# Altium PCB FEU31_Part2.PcbDoc
Units mm, origin at the board's own origin, x right, y up, seen from the top; angles counter-clockwise.
Board outline 40 x 40 mm, 2 copper layers (Top Layer, Bottom Layer), stack 1.021 mm thick; 66 components, 35 nets, 154 pads, 12 vias.
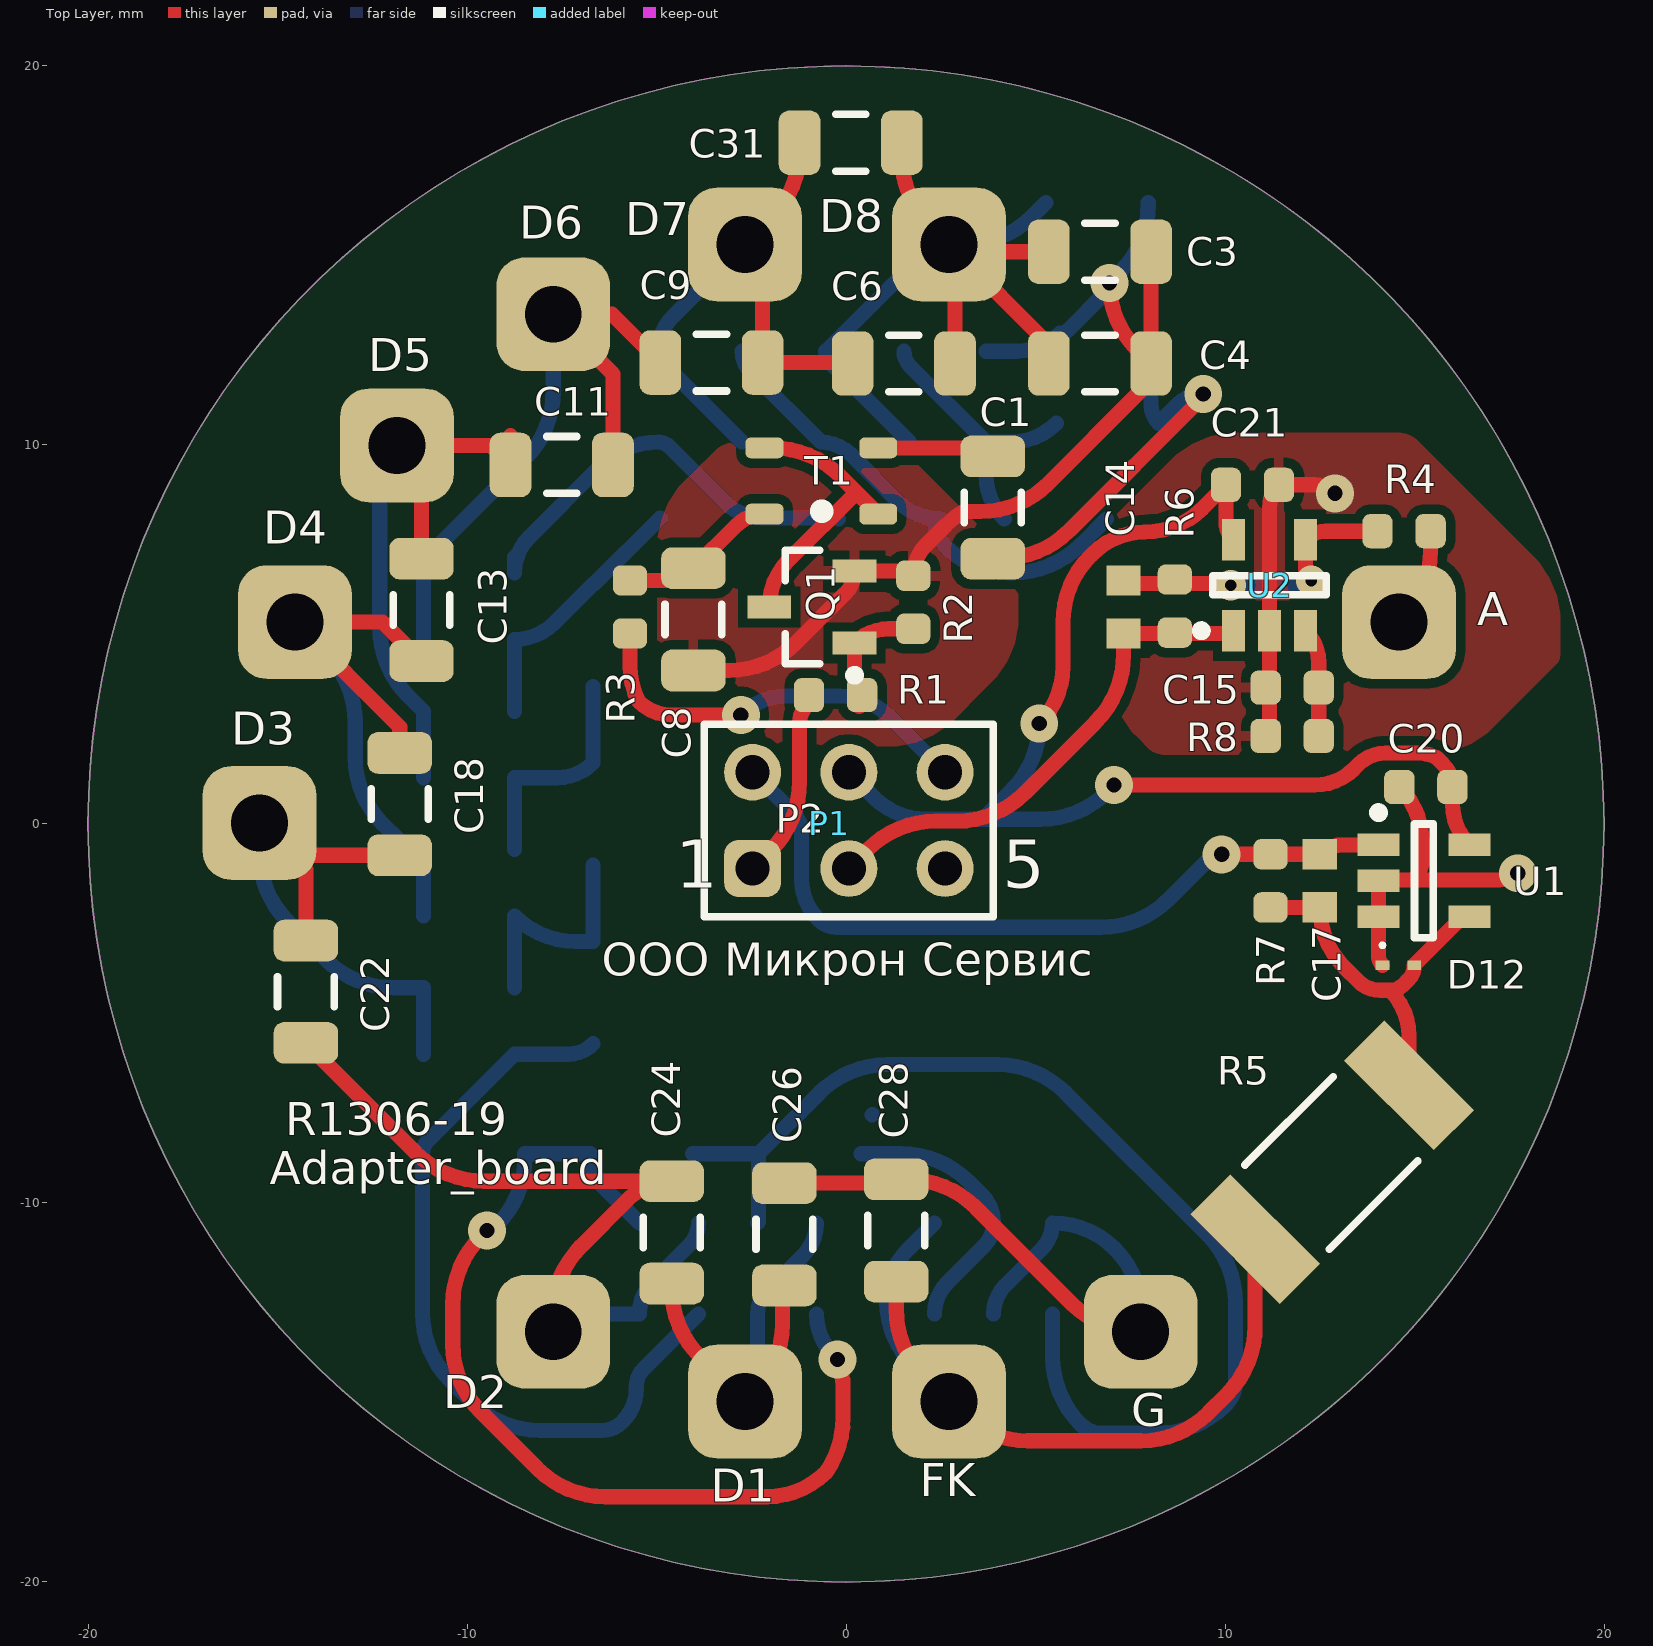
[diagram p0: Top Layer view]
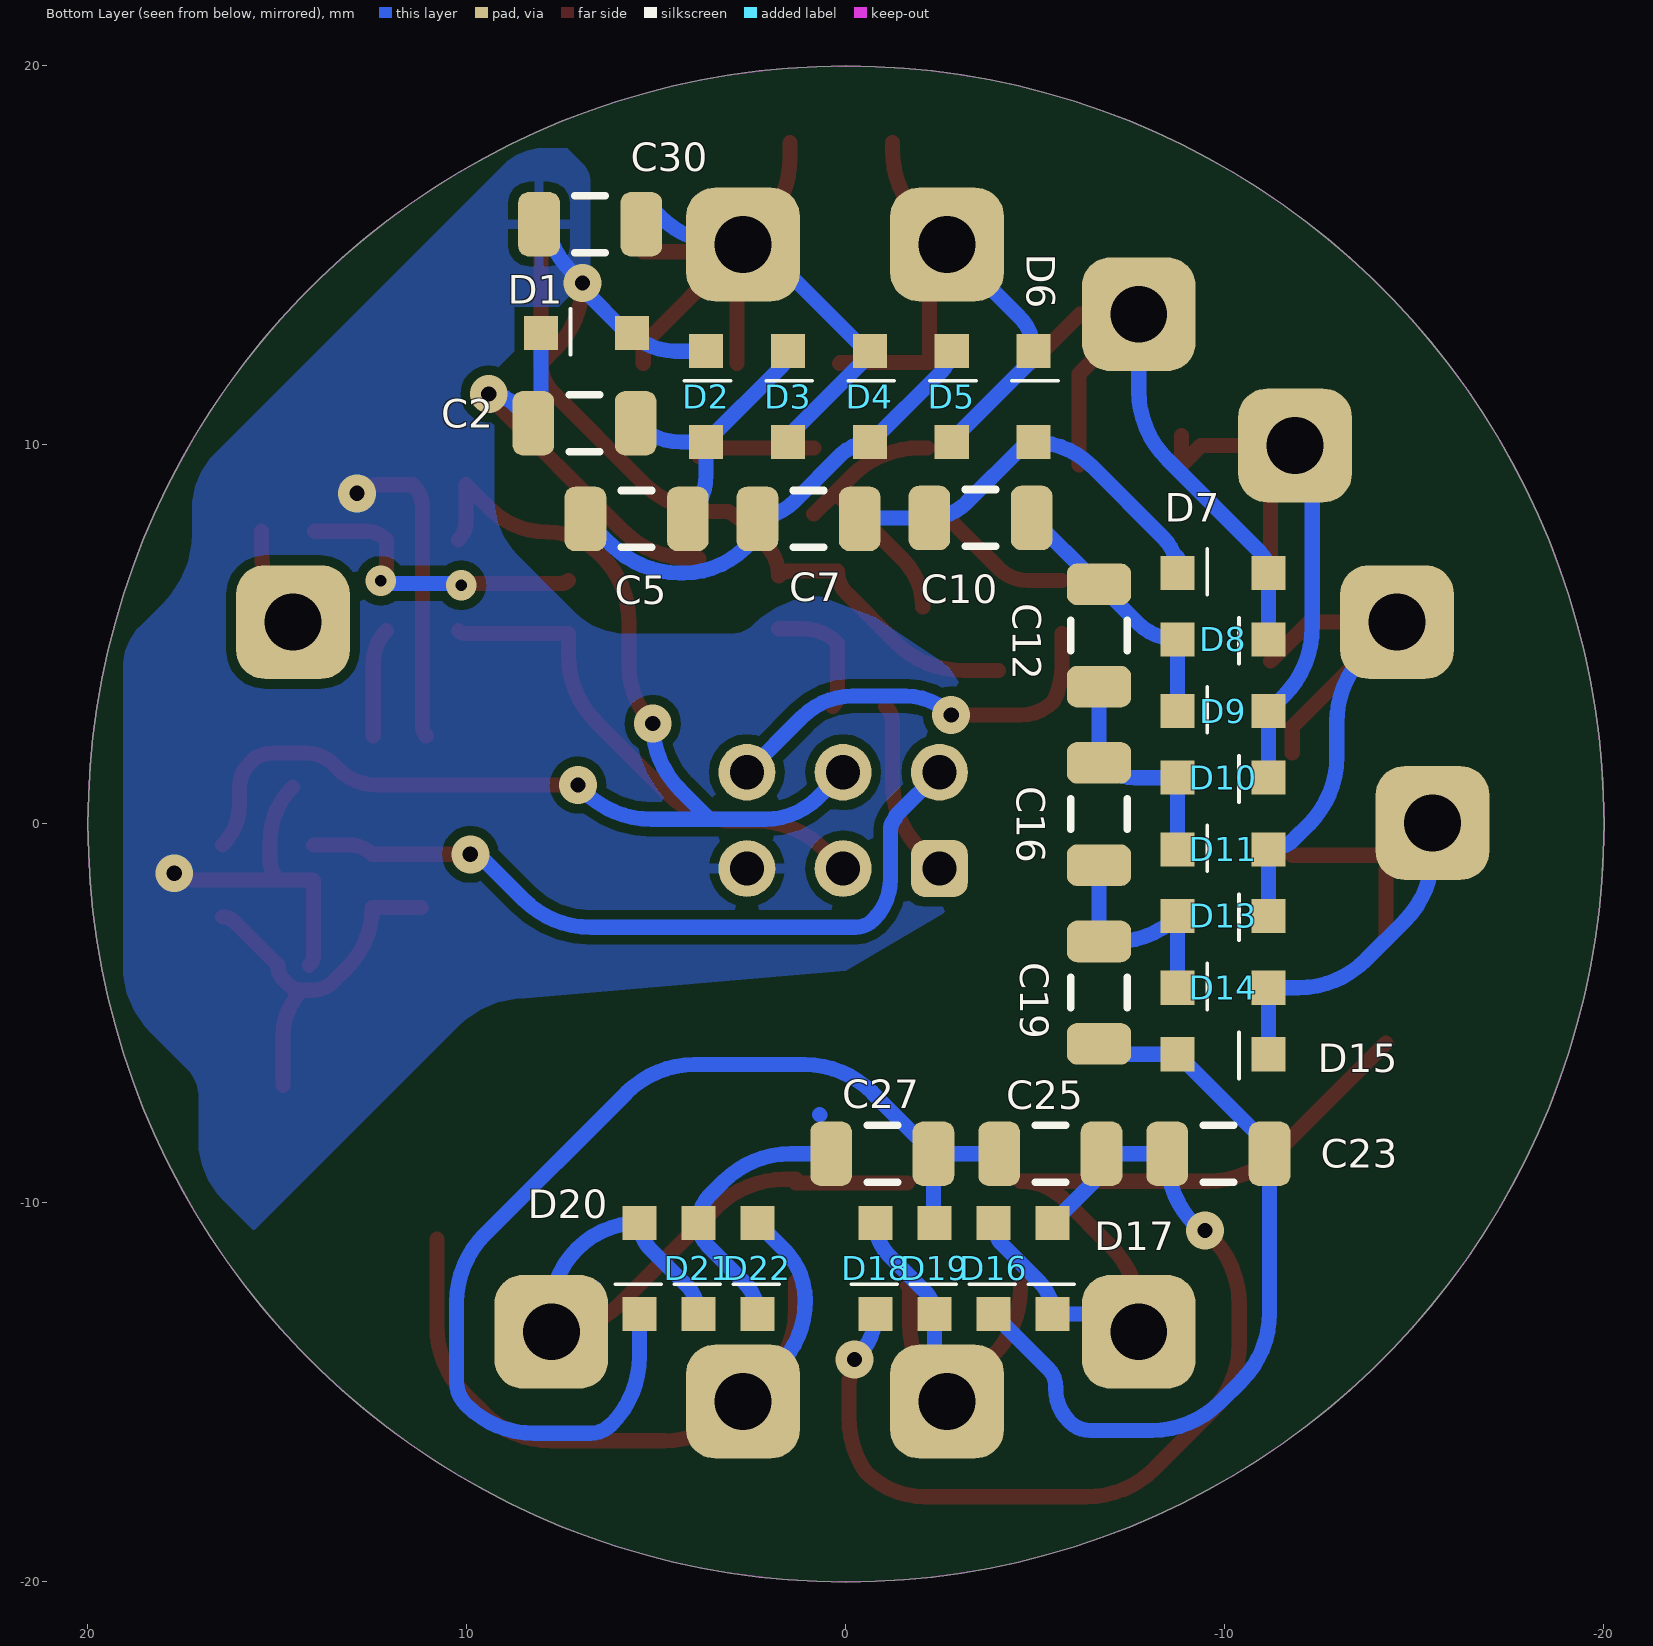
[diagram p1: Bottom Layer view, seen from below]
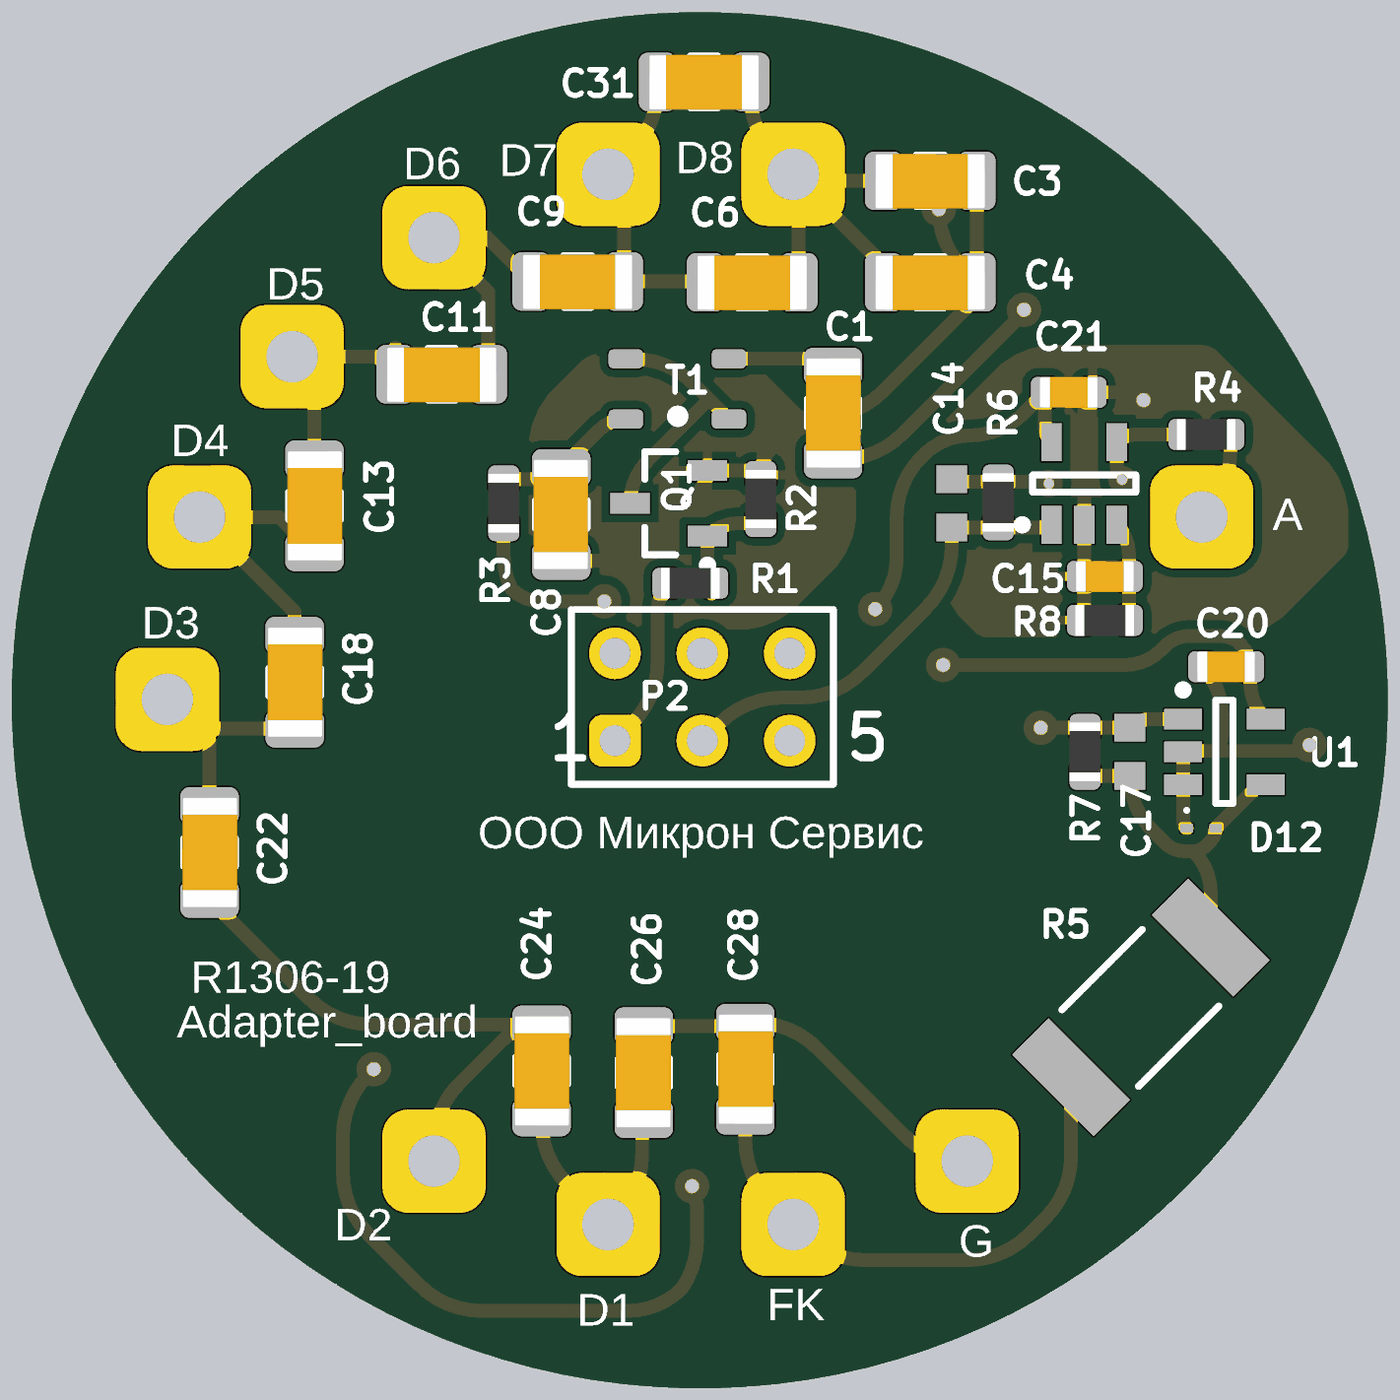
[diagram p2: 3D render of the assembled board from above, using the file's embedded part models]

## Layer stack, top to bottom
Top Solder: solder mask 0.0102, Solder Resist, Dk 3.5
Top Layer: signal copper 0.0356
Dielectric1: dielectric 0.95, FR-4, Dk 4.8
Bottom Layer: signal copper 0.0356
Bottom Solder: solder mask 0.0102, Solder Resist, Dk 3.5

## Board outline
-20.025,-0.025 ccw(c-0.025,-0.025) -0.025,-20.025 ccw(c-0.025,-0.025) 19.975,-0.025 ccw(c-0.025,-0.025) -0.025,19.975 ccw(c-0.025,-0.025)

## Design rules (kind name [scope] priority, off if disabled: settings)
Clearance [All] p1: gap=0.25
ComponentClearance [All] p1: gap=0.1 collisioncheckmode=3 verticalgap=0.254 showdistances=TRUE
HoleSize [All] p1: absolutevalues=TRUE maxlimit=2.54 minlimit=0.3 maxpercent=80.000 minpercent=20.000
HoleToHoleClearance [All] p1: gap=0.2 allowstackedmicrovias=TRUE
MinimumAnnularRing [All] p1: minimumring=0.3
MinimumSolderMaskSliver [All] p1: minsoldermaskwidth=0.152
PlaneClearance [All] p1: clearance=2
PlaneConnect [All] p1: planeconnectstyle=Relief reliefexpansion=0.457 reliefentries=4 reliefconductorwidth=0.3 reliefairgap=0.457
PolygonConnect PolygonConnect_via [IsVia] p1: connectstyle=Direct reliefconductorwidth=0.254 reliefentries=4 polygonreliefangle="90 Angle" airgapwidth=0.254
PolygonConnect [All] p2: connectstyle=Relief reliefconductorwidth=0.254 reliefentries=4 polygonreliefangle="90 Angle" airgapwidth=0.254
RoutingVias [All] p1: holewidth=0.3 width=0.62 viastyle="Through Hole" minholewidth=0.3 minwidth=0.62 maxholewidth=6 maxwidth=4
SilkToSilkClearance [All] p1: silktosilkclearance=0.152
SilkToSolderMaskClearance SilkscreenOverComponentPads [IsPad] p1: minsilkscreentomaskgap=0.1 clearancetoexposedcopper=TRUE
SolderMaskExpansion [All] p1: expansion=0.05
Width [All] p1: maxlimit=2.254 minlimit=0.4 preferedwidth=0.4
22 further rules are at their usual default settings.

## Components (designator, comment, footprint, x,y, rotation, side; value= is the part's Value field where it differs from the comment)
C1 "100nF" C1206 3.85,8.325 r90 top
C2 "100nF" C1206 6.875,10.55 r0 bottom
C3 "100nF" C1206 6.675,15.075 r0 top
C4 "100nF" C1206 6.675,12.125 r0 top
C5 "100nF" C1206 5.5,8.025 r180 bottom
C6 "100nF" C1206 1.5,12.125 r0 top
C7 "100nF" C1206 0.962,8.025 r0 bottom
C8 "4.7uF" C1206 -4.05,5.375 r270 top
C9 "100nF" C1206 -3.575,12.15 r0 top
C10 "100nF" C1206 -3.575,8.05 r0 bottom
C11 "100nF" C1206 -7.525,9.45 r0 top
C12 "100nF" C1206 -6.7,4.95 r90 bottom
C13 "100nF" C1206 -11.225,5.625 r90 top
C14 "2.2pF" 1608[0603] 7.3,5.7 r270 top
C15 "0pF" 1608[0603]_CAP 11.75,3.575 r180 top
C16 "100nF" C1206 -6.7,0.238 r90 bottom
C17 "0pF" 1608[0603] 12.475,-1.525 r90 top
C18 "100nF" C1206 -11.8,0.5 r90 top
C19 "100nF" C1206 -6.7,-4.475 r90 bottom
C20 "1uF" 1608[0603]_CAP 15.275,0.95 r180 top
C21 "1uF" 1608[0603]_CAP 10.7,8.925 r0 top
C22 "100nF" C1206 -14.275,-4.45 r90 top
C23 "100nF" C1206 -9.85,-8.725 r180 bottom
C24 "100nF" C1206 -4.625,-10.8 r90 top
C25 "100nF" C1206 -5.417,-8.725 r180 bottom
C26 "100nF" C1206 -1.65,-10.85 r270 top
C27 "100nF" C1206 -0.983,-8.725 r180 bottom
C28 "100nF" C1206 1.3,-10.75 r90 top
C30 "100nF" C1206 6.725,15.8 r0 bottom
C31 "100nF" C1206 0.1,17.95 r0 top
D1 "" DA2JF8100L 5.625,12.925 r0 bottom
D2 "" DA2JF8100L 3.665,10.05 r90 bottom
D3 "" DA2JF8100L 1.505,10.05 r90 bottom
D4 "" DA2JF8100L -0.655,10.05 r90 bottom
D5 "" DA2JF8100L -2.815,10.05 r90 bottom
D6 "" DA2JF8100L -4.975,10.05 r90 bottom
D7 "" DA2JF8100L -11.175,6.6 r0 bottom
D8 "" DA2JF8100L -8.775,4.846 r180 bottom
D9 "" DA2JF8100L -11.175,2.951 r0 bottom
D10 "" DA2JF8100L -8.775,1.197 r180 bottom
D11 "" DA2JF8100L -11.175,-0.697 r0 bottom
D12 "ESD9R3.3ST5G" ONSC-SOD-923-2-514AB-01_V 14.55,-3.75 r0 top
D13 "" DA2JF8100L -8.775,-2.451 r180 bottom
D14 "" DA2JF8100L -11.175,-4.346 r0 bottom
D15 "" DA2JF8100L -8.775,-6.1 r180 bottom
D16 "" DA2JF8100L -3.918,-10.55 r270 bottom
D17 "" DA2JF8100L -5.475,-10.55 r270 bottom
D18 "" DA2JF8100L -0.804,-10.55 r270 bottom
D19 "" DA2JF8100L -2.361,-10.55 r270 bottom
D20 "" DA2JF8100L 5.425,-10.55 r270 bottom
D21 "" DA2JF8100L 3.868,-10.55 r270 bottom
D22 "" DA2JF8100L 2.311,-10.55 r270 bottom
P1 "Header 9X2" R1306-19 0,0 r0 top locked
P2 "Header 3X2" HDR2X3 -2.49,-1.2 r0 top
Q1 "IRLML6344" SOT-23_N -0.925,5.7 r180 top
R1 "100R" 1608[0603]_RES -0.3,3.375 r0 top
R2 "47k" 1608[0603]_RES 1.75,5.825 r270 top
R3 "12R" 1608[0603]_RES -5.725,5.7 r270 top
R4 "390K" 1608[0603]_RES 14.7,7.7 r0 top
R5 "5G" HVF2512T5007FE 12.8,-8.95 r45 top
R6 "47k" 1608[0603]_RES 8.65,5.725 r270 top
R7 "15M" 1608[0603]_RES 11.175,-1.525 r90 top
R8 "0R" 1608[0603]_RES 11.75,2.3 r0 top
T1 "ATB322515-0110" ATB322515-0110 -2.175,9.9 r0 top
U1 "AD8541ARTZ" ADI-RJ-5_N 15.225,-1.525 r0 top
U2 "OPA353NA" ADI-RJ-5_N 11.15,6.275 r90 top

## Footprints (in the part's own frame and the unit in brackets; to place one, negate y for a bottom-side part, rotate by r counter-clockwise, add the part's x,y. Pads: shape width x height; smd on the part's side, far side on the other; paste and mask are expansions set on the pad)
1608[0603] [mm] "Chip Capacitor, Body 1.6x0.8mm, IPC High Density"
  rect 0.8x0.9 smd: 1(-0.7,0) 2(0.7,0)
  body extent -0.87,-0.48 0.87,0.48, height 1.3
1608[0603]_CAP [mm] "Chip Capacitor, Body 1.6x0.8mm, IPC High Density"
  rrect50% 0.8x0.9 smd: 1(-0.7,0) 2(0.7,0)
  body extent -0.85,-0.45 0.85,0.45, height 0.8
1608[0603]_RES [mm] "Chip Capacitor, Body 1.6x0.8mm, IPC High Density"
  rrect50% 0.8x0.9 smd: 1(-0.7,0) 2(0.7,0)
  body extent -0.85,-0.45 0.85,0.45, height 0.45
ADI-RJ-5_N [mm] "SOT-23, 5-Leads, Body 2.9x1.6mm, Pitch 0.95mm, IPC Medium Density"
  rect 1.1x0.6 smd: 1(-1.2,0.95) 2(-1.2,0) 3(-1.2,-0.95) 4(1.2,-0.95) 5(1.2,0.95)
  silkscreen extent -1.32,-1.5 0.25,1.92, body extent -0.85,-1.5 0.85,1.5, height 1.45
ATB322515-0110 [mm]
  rrect50% 1x0.55 smd: 1(0,-1.75) 2(0,0) 3(3,0) 4(3,-1.75)
  silkscreen extent 1.5,-1.68 1.52,-1.66, body extent -0.1,-2.15 3.1,0.35, height 1.55
C1206 [mm] "Chip Capacitor, Body 3.2x1.6mm, IPC High Density"
  rrect50% 1.1x1.7 smd: 1(-1.35,0) 2(1.35,0)
  silkscreen extent -0.4,-0.75 0.4,0.75, body extent -1.6,-0.81 1.6,0.79, height 1.6
DA2JF8100L [mm]
  rect 0.9x0.9 smd: 1(0,0) 2(2.4,0)
  silkscreen extent 1.62,-0.64 1.62,0.57, body extent 0.36,-0.65 2.06,0.6, height 0.7
HDR2X3 [mm] "Connector; Header; 3x2 Position"
  rrect50% 1.5x1.5 hole 0.9: 1(0,0)
  round 1.5 hole 0.9: 2(0,2.54) 3(2.54,0) 4(2.54,2.54) 5(5.08,0) 6(5.08,2.54)
  silkscreen extent -1.27,-1.27 6.35,3.81
HVF2512T5007FE [mm] "Chip Resistor, 2-Leads, Body 7,31x3,20mm, IPC Low Density"
  rect 1.5x3.35 smd: 1(-2.87,0) 2(2.87,0)
  silkscreen extent -1.68,-1.58 1.62,1.57, body extent -3.68,-1.6 3.63,1.6, height 0.82
ONSC-SOD-923-2-514AB-01_V [mm] "SOD, 2-Leads, Body 0.8x0.6mm"
  rect 0.36x0.25 smd: 1(-0.42,0) 2(0.42,0)
  silkscreen extent -0.47,0.48 -0.37,0.57, body extent -0.4,-0.3 0.4,0.3, height 0.4
R1306-19 [mm]
  rrect50% 3x3 hole 1.5: 1(-2.692,-15.265) 2(-7.75,-13.423) 5(-15.5,0) 6(-14.565,5.301) 7(-11.874,9.963) 8(-7.75,13.423) 9(-2.692,15.265) 10(2.692,15.265) 13(14.565,5.301) 17(7.75,-13.423) 18(2.692,-15.265)
SOT-23_N [mm] "SOT23, 3-Leads, Body 2.9x1.3mm, Pitch 0.95mm, Lead Span 2.3mm, IPC Medium Density"
  rect 1.15x0.6 smd: 1(-1.125,0.95) 2(-1.125,-0.95) 3(1.125,0)
  silkscreen extent -1.25,-1.5 0.7,1.92, body extent -0.7,-1.5 0.7,1.5, height 1.11

## Part data
C1 C2 C3 C4 C5 C6 C7 C8 C9 C10 C11 C12 C13 C14 C15 C16 C17 C18 C19 C20 C21 C22 C23 C24 C25 C26 C27 C28 C30 C31: library part "Cap Semi", "Capacitor (Semiconductor SIM Model)"
D1 D2 D3 D4 D5 D6 D7 D8 D9 D10 D11 D13 D14 D15 D16 D17 D18 D19 D20 D21 D22: library part Diode, "Default Diode"
D12: "Transient Voltage Suppressor, ESD Protection Diode with Ultra-Low Leakage, 2-Pin SOD-923, Pb-Free, Tape and Reel"
P1: "Header, 9-Pin, Dual row"
P2: "Header, 3-Pin, Dual row"
Q1: library part IRLML2402, "HEXFET Power MOSFET"
R1 R2 R3 R4 R5 R6 R7 R8: library part "Resistor 0805"
U1 U2: library part AD8541ARTZ-R2, "Single Channel RRIO Operational Amplifier, 1 MHz BW, 920 mV/us SR, Industrial, 5-pin SOT23 (RJ-5), Reel"

## Via types
v1: diameter 1, hole 0.4, Top Layer to Bottom Layer, tented both sides, 10 vias
v2: diameter 0.8, hole 0.3, Top Layer to Bottom Layer, tented both sides, 2 vias

## Nets (pads, with @x,y where several pads share a name; then routed paths per layer and width w, separated by ;. In a path a pad name is that pad's centre, name@x,y a point inside that pad or via, vN(x,y) a via of type N, cw(c..) or ccw(c..) an arc to the next point about the centre after c; other vN are vias at no path point)
ANODE: P1.13 R4.2 | length 2.6
  Top Layer w0.4: P1.13 14.656,5.392 ccw(c12.86,7.188) 15.4,7.188 R4.2
DINODE1: C24.1 C26.2 D18.1 D19.2 P1.1 | length 12.7
  Top Layer w0.4: C24.1 -4.625,-12.279 ccw(c-2.085,-12.279) -3.881,-14.075 P1.1 -2.444,-15.017 ccw(c-4.24,-13.221) -1.7,-13.221 -1.7,-12.15 C26.2
  Bottom Layer w0.4: P1.1 -2.361,-14.934 D19.2 cw(c-1.542,-12.95) -2.121,-12.371 -1.16,-11.41 ccw(c-2.019,-10.55) D18.1
DINODE2: C22.1 C24.2 D16.1 D17.2 P1.2 | length 22
  Top Layer w0.4: C22.1 -11.369,-8.706 ccw(c-9.573,-6.91) -9.573,-9.45 C24.2 ccw(c-4.625,-11.08) -5.777,-9.927 -7.006,-11.156 ccw(c-5.21,-12.952) -7.75,-12.952 P1.2
  Bottom Layer w0.4: P1.2 -7.277,-12.95 D17.2 cw(c-4.268,-12.95) -5.121,-12.096 -4.16,-11.135 ccw(c-4.746,-10.55) D16.1
DINODE3: C18.1 C22.2 D14.1 D15.2 P1.5 | length 15.2
  Top Layer w0.4: P1.5 P1.5@-14.65,-0.85 ; C22.2 -14.275,-1.225 P1.5@-14.65,-0.85 ; C18.1 P1.5@-14.65,-0.85
  Bottom Layer w0.4: P1.5 -15.5,-0.798 ccw(c-12.96,-0.798) -14.756,-2.594 -13.748,-3.602 ccw(c-11.952,-1.806) -11.952,-4.346 D14.1 D15.2
DINODE4: C13.1 C18.2 D11.1 D13.2 P1.6 | length 17.5
  Top Layer w0.4: C18.2 -11.8,2.536 P1.6 -12.251,5.301 C13.1
  Bottom Layer w0.4: P1.6 -13.719,4.455 cw(c-15.515,2.659) -12.975,2.659 -12.975,1.752 ccw(c-10.435,1.752) -12.231,-0.044 -11.863,-0.412 ccw(c-11.175,0.275) D11.1 D13.2
DINODE5: C11.1 C13.2 D9.1 D10.2 P1.7 | length 16.5
  Top Layer w0.4: C13.2 -11.225,9.315 P1.7 -9.388,9.963 C11.1 C11.1@-8.875,10.223
  Bottom Layer w0.4: P1.7 ccw(c-10.784,8.874) -12.325,8.874 -12.325,5.154 ccw(c-9.785,5.154) -11.581,3.357 D9.1 D10.2
DINODE6: C9.1 C11.2 D7.1 D8.2 P1.8 | length 17.8
  Top Layer w0.4: C11.2 -6.175,11.848 P1.8 -6.198,13.423 C9.1
  Bottom Layer w0.4: D8.2 D7.1 cw(c-10.39,6.6) -10.945,7.155 -8.494,9.606 ccw(c-10.29,11.402) -7.75,11.402 P1.8
DINODE7: C6.1 C9.2 C31.1 D5.1 D6.2 P1.9 | length 15.9
  Top Layer w0.4: C31.1 -1.25,17.758 cw(c-3.79,17.758) -1.994,15.962 P1.9 -2.225,14.798 C9.2 0.125,12.15 C6.1
  Bottom Layer w0.4: D5.1@-2.767,10.05 -4.839,12.123 cw(c-4.512,12.45) D6.2 cw(c-3.693,12.45) -4.599,13.357 P1.9
DINODE8: C3.1 C4.1 C6.2 C30.1 C31.2 D3.1 D4.2 P1.10 | length 23.5
  Top Layer w0.4: C31.2 1.45,17.558 ccw(c3.99,17.558) 2.194,15.762 P1.10 P1.10@3.087,15.265 ; C6.2 P1.10@2.85,15.106 ; C4.1 5.325,12.631 P1.10@2.85,15.106 ; C3.1 2.925,15.075 cw(c2.925,15.181) P1.10@2.85,15.106
  Bottom Layer w0.4: D3.1@1.65,10.05 -0.423,12.123 cw(c-0.096,12.45) -0.558,12.45 1.948,14.957 cw(c2.692,14.213) P1.10 3.087,15.265 ccw(c3.087,17.805) 4.883,16.008 C30.1@5.25,16.375
FOTOKAT: C28.1 D22.1 P1.18 R5.1 | length 21.7
  Top Layer w0.4: C28.1 1.3,-12.821 ccw(c3.84,-12.821) 2.044,-14.617 P1.18 2.983,-15.556 ccw(c4.779,-13.76) 4.779,-16.3 7.748,-16.3 ccw(c7.748,-13.76) 9.544,-15.556 10.027,-15.073 ccw(c8.23,-13.277) 10.77,-13.277 R5.1
  Bottom Layer w0.4: D22.1 1.608,-11.253 ccw(c2.956,-12.6) 1.105,-12.145 ccw(c2.956,-12.6) 1.05,-12.6 ccw(c3.52,-12.6) 1.773,-14.346 P1.18
G: C26.1 C28.2 D20.1 D21.2 P1.17 | length 19.6
  Top Layer w0.4: C26.1 C28.2@1.3,-9.5 ; C28.2 1.598,-9.4 cw(c1.598,-11.94) 3.394,-10.144 5.929,-12.679 ccw(c7.725,-10.883) 7.725,-13.423 P1.17
  Bottom Layer w0.4: D21.2 cw(c4.937,-12.95) 4.181,-12.194 5.142,-11.233 ccw(c4.459,-10.55) D20.1 cw(c5.425,-12.875) 7.75,-12.875 P1.17 P1.17@6.6,-12.273
GND: C3.2 C4.2 C8.2 C15.2 C20.2 C21.2 C30.2 D1.1 D2.2 D12.1 P2.5 Q1.2 R2.1 R8.1 U1.2 U1.3 U2.2 | length 44.7
  Top Layer w0.4: C8.2 -3.127,4.025 ccw(c-3.127,6.565) -1.331,4.769 -0.047,6.053 ccw(c-0.645,6.65) Q1.2 1.448,6.65 cw(c1.448,6.223) R2.1 cw(c2.897,6.525) 2.086,7.336 2.614,7.864 cw(c4.15,6.327) 3.078,8.217 3.515,8.217 ccw(c3.515,10.757) 5.311,8.961 7.707,11.357 ccw(c6.939,12.125) C4.2 ; v1(6.925,14.25) ccw(c9.4,14.25) 7.65,12.5 C4.2 ; C3.2 C4.2 ; R8.1 ccw(c10.809,2.541) 11.15,2.541 U2.2 11.15,8.321 cw(c12.004,8.321) C21.2 12.332,8.925 cw(c12.332,8.157) v1(12.875,8.7) ; D12.1 cw(c14.383,-3.497) 14.025,-3.497 U1.3 U1.2 cw(c14.085,-1.585) 14.085,-1.5 14.95,-1.5 ; C20.2 cw(c13.126,-0.499) 15.175,-0.499 15.175,-0.957 cw(c14.407,-0.957) 14.95,-1.5 ; v1(17.7,-1.325) 17.625,-1.325 cw(c17.203,-0.903) 17.203,-1.5 14.95,-1.5
  Bottom Layer w0.4: D2.2 4.478,12.45 ccw(c4.478,14.072) D1.1 ccw(c5.625,13.227) 5.838,13.013 6.819,13.994 ccw(c6.563,14.25) v1(6.925,14.25) 7.206,14.531 ccw(c5.41,16.327) 7.95,16.327 C30.2@7.95,16.375
NetC1_1: C1.1 C2.2 D1.2 | length 11.2
  Top Layer w0.4: C1.1 4.073,6.975 ccw(c4.073,9.515) 5.869,7.719 9.347,11.197 ccw(c9.219,11.325) v1(9.4,11.325)
  Bottom Layer w0.4: D1.2 8.025,11.033 ccw(c8.708,11.033) C2.2 8.717,11.042 cw(c9.4,10.359) v1(9.4,11.325)
NetC2_1: C2.1 C5.2 D2.1 D3.2 | length 7.4
  Bottom Layer w0.4: D3.2 ccw(c2.084,12.45) 1.675,12.04 D2.1 ; C5.2 cw(c5.321,9.196) 3.665,9.196 D2.1 ; C2.1 cw(c4.318,11.757) 4.318,10.05 D2.1
NetC5_1: C5.1 C7.2 D4.1 D5.2 | length 12.8
  Bottom Layer w0.4: D5.2@-2.767,12.45 ccw(c-1.99,12.45) -2.539,11.901 -0.688,10.05 cw(c-0.688,8.931) 0.103,9.722 1.323,8.502 ccw(c2.475,9.655) C7.2@2.475,8.025 ; C7.2 ccw(c3.369,8.025) 2.622,7.278 ccw(c4.259,8.915) 4.259,6.6 4.373,6.6 ccw(c4.373,9.14) 6.169,7.344 C5.1
NetC7_1: C7.1 C10.2 D6.1 D7.2 | length 11.3
  Bottom Layer w0.4: D7.2@-8.775,7.023 D7.2 cw(c-7.447,6.6) -8.386,7.539 -6.511,9.414 cw(c-4.975,7.877) D6.1 cw(c-4.975,9.628) -4.676,9.926 -3.207,8.457 ccw(c-2.225,9.438) C10.2 -0.285,8.05 cw(c-0.285,7.965) C7.1@-0.225,8.025
NetC8_1: C8.1 R3.1 T1.1 | length 4.2
  Top Layer w0.4: R3.1 -4.835,6.4 ccw(c-4.835,7.51) C8.1 -2.943,7.832 cw(c-2.175,7.064) T1.1
NetC10_1: C10.1 C12.2 D8.1 D9.2 | length 7
  Bottom Layer w0.4: D9.2 D8.1 ccw(c-8.775,6.344) -7.715,5.285 C12.2 ccw(c-6.7,6.36) -6.657,6.318 C10.1
NetC12_1: C12.1 C16.2 D10.1 D11.2 | length 6.1
  Bottom Layer w0.4: D11.2 D10.1 -7.642,1.197 ccw(c-7.642,2.53) C16.2 C12.1
NetC14_1: C14.1 R4.1 R6.1 U2.4 | length 8.1
  Top Layer w0.4: C14.1 ccw(c7.481,6.581) 7.481,6.325 v2@10.125,6.325 ; v2(12.25,6.39) ccw(c12.165,6.39) 12.225,6.45 cw(c12.527,6.752) 12.1,6.752 U2.4 cw(c12.643,6.932) 12.643,7.7 R4.1
  Bottom Layer w0.4: v2@10.125,6.325 12.094,6.325 ccw(c12.094,6.546) v2(12.25,6.39)
  other v2: 10.125,6.275
NetC15_1: C15.1 R8.2 U2.3 | length 2.9
  Top Layer w0.4: U2.3 cw(c11.255,4.23) 12.45,4.23 R8.2
NetC16_1: C16.1 C19.2 D13.1 D14.2 | length 6.2
  Bottom Layer w0.4: D14.2 D13.1 ccw(c-7.149,-0.825) -7.149,-3.125 C19.2 C16.1
NetC17_1: C17.1 D12.2 R5.2 R7.1 U1.4 | length 10.1
  Top Layer w0.4: R7.1 C17.1 ccw(c14.718,-2.225) 12.99,-3.655 ccw(c14.718,-2.225) 13.132,-3.811 13.496,-4.175 ; 13.496,-4.175 ccw(c14.07,-3.6) 14.07,-4.413 14.33,-4.413 ; R5.2 14.83,-5.62 ccw(c13.123,-5.62) 14.33,-4.413 ; U1.4 ccw(c16.425,-2.91) 16.118,-2.602 D12.2 cw(c14.415,-3.75) 14.807,-4.143 14.684,-4.266 cw(c14.33,-3.911) 14.33,-4.413
NetC19_1: C19.1 C23.2 D15.1 D16.2 | length 20.6
  Bottom Layer w0.4: C19.1 cw(c-7.364,-5.161) -7.364,-6.1 D15.1 -11.059,-8.384 ccw(c-10.717,-8.725) C23.2 -11.2,-12.923 ccw(c-8.66,-12.923) -10.456,-14.719 -9.894,-15.281 ccw(c-8.098,-13.485) -8.098,-16.025 -6.468,-16.025 ccw(c-6.468,-15.257) -5.925,-15.8 ccw(c-6.812,-14.913) -5.558,-14.913 -5.558,-14.875 cw(c-4.869,-14.875) -5.356,-14.388 ; -5.356,-14.388 D16.2
NetC23_1: C23.1 C25.2 D17.1 D18.2 | length 26.4
  Top Layer w0.4: v1(-9.5,-10.75) -9.656,-10.906 ccw(c-7.86,-12.702) -10.4,-12.702 -10.4,-13.748 ccw(c-7.86,-13.748) -9.656,-15.544 -8.169,-17.031 ccw(c-6.373,-15.235) -6.373,-17.775 -2.112,-17.775 ccw(c-2.112,-15.562) -0.547,-17.127 ccw(c-2.64,-15.687) -0.1,-15.687 -0.1,-14.829 ccw(c-0.954,-14.829) -0.35,-14.225 -0.293,-14.168 cw(c-0.25,-14.21) v1(-0.25,-14.15)
  Bottom Layer w0.4: v1(-9.5,-10.75) ccw(c-9.5,-10.448) -9.287,-10.662 -9.244,-10.619 ccw(c-11.04,-8.823) -8.5,-8.823 C23.1 C25.2 -6.767,-9.258 D17.1 ; D18.2 ccw(c0.757,-12.95) -0.347,-14.053 v1(-0.25,-14.15)
NetC25_1: C25.1 C27.2 D19.1 D20.2 | length 30
  Bottom Layer w0.4: C25.1 C27.2 ; D19.1 -2.333,-10.523 C27.2 ; D20.2 5.425,-14.073 ccw(c7.965,-14.073) 6.169,-15.869 ccw(c6.727,-15.311) 6.727,-16.1 8.198,-16.1 ccw(c8.198,-13.56) 9.994,-15.356 ccw(c9.376,-14.738) 10.25,-14.738 10.25,-12.652 ccw(c7.71,-12.652) 9.506,-10.856 5.769,-7.119 ccw(c3.973,-8.915) 3.973,-6.375 1.069,-6.375 ccw(c1.069,-8.915) -0.727,-7.119 C27.2
NetC27_1: C27.1 D21.1 D22.2 | length 7.3
  Bottom Layer w0.4: C27.1 1.423,-8.725 cw(c1.423,-11.265) 3.219,-9.469 3.562,-9.812 cw(c2.824,-10.55) D21.1 cw(c3.006,-10.55) 3.615,-11.16 2.654,-12.121 ccw(c3.483,-12.95) D22.2 ; 0.664,-7.7 0.674,-7.69
NetQ1_1: Q1.1 R1.2 R2.2 | length 3.4
  Top Layer w0.4: R1.2@0.325,3.075 cw(c0.627,3.377) 0.2,3.377 Q1.1 cw(c1.105,3.845) 1.105,5.125 R2.2
NetQ1_3: Q1.3 T1.2 T1.4 | length 7.5
  Top Layer w0.4: T1.2 -1.977,9.9 cw(c-1.977,7.36) -0.181,9.156 0.25,8.725 ; Q1.3 cw(c-0.3,5.7) -1.537,6.938 0.25,8.725 ; T1.4 0.25,8.725
PULSE: P2.1 R1.1 | length 4.7
  Top Layer w0.4: P2.1 -1.994,-0.704 ccw(c-3.79,1.092) -1.25,1.092 -1.25,2.653 cw(c-0.653,2.653) R1.1@-1.075,3.075
PUMP: C1.2 T1.3 | length 3.1
  Top Layer w0.4: T1.3 3.307,9.9 cw(c3.307,9.132) C1.2
SIGOUT: C14.2 P2.3 R6.2 U2.1 | length 13.3
  Top Layer w0.4: P2.3 0.556,-0.694 cw(c2.352,-2.49) 2.352,0.05 2.898,0.05 ccw(c2.898,2.59) 4.694,0.794 6.556,2.656 ccw(c4.76,4.452) 7.3,4.452 C14.2 10.019,5 ccw(c10.019,5.256) U2.1
VCC: C20.1 C21.1 P2.4 U1.5 U2.5 | length 32.5
  Top Layer w0.4: v1(5.075,2.625) ccw(c3.566,4.134) 5.7,4.134 5.7,5.3 cw(c8.175,5.3) 6.425,7.05 6.484,7.109 cw(c7.85,5.744) 7.85,7.675 ccw(c7.85,9.848) 9.386,8.311 C21.1 10,7.958 ccw(c10.683,7.958) U2.5 ; v1(7.05,1) 12.334,1 ccw(c12.334,2.488) 13.386,1.436 13.5,1.55 cw(c14.224,0.826) 14.224,1.85 15.055,1.85 cw(c15.055,0.759) 15.553,1.73 15.722,1.56 cw(c15.112,0.95) C20.1 15.975,0.511 ccw(c17.511,0.511) U1.5
  Bottom Layer w0.4: P2.4 0.717,0.673 ccw(c2.1,2.056) 2.1,0.1 3.573,0.1 ; v1(5.075,2.625) cw(c2.606,2.625) 4.352,0.879 3.573,0.1 ; v1(7.05,1) 6.894,0.844 cw(c5.098,2.64) 5.098,0.1 3.573,0.1
VCC_BAT: P2.6 R3.2 | length 10.9
  Top Layer w0.4: R3.2 -5.725,4.157 ccw(c-3.595,4.157) -5.503,3.211 ccw(c-4.632,4.083) -4.632,2.85 v1(-2.8,2.85)
  Bottom Layer w0.4: v1(-2.8,2.85) cw(c-1.593,1.643) -1.593,3.35 -0.2,3.35 cw(c-0.2,1.467) 1.132,2.798 P2.6
VSENS: C17.2 P2.2 R7.2 U1.1 | length 20.1
  Top Layer w0.4: v1(9.887,-0.825) R7.2 C17.2 cw(c13.079,-1.429) 13.079,-0.575 U1.1
  Bottom Layer w0.4: P2.2 -1.36,0.21 ; -1.36,0.21 cw(c-1.446,0.125) -1.325,0.125 cw(c-1.627,-0.177) -1.2,-0.177 -1.2,-1.464 ccw(c0.336,-1.464) -0.75,-2.55 ccw(c-0.267,-2.067) -0.267,-2.75 6.698,-2.75 ccw(c6.698,-0.21) 8.494,-2.006 9.525,-0.975 cw(c9.887,-1.337) v1(9.887,-0.825)

## Polygon pours and split planes (outlines as drawn)
GND on Bottom Layer "Top Layer-No Net" (solid, pour order 16): 15.575,-10.725 10.219,-5.369 ccw(c8.423,-7.165) 8.423,-4.625 -0.025,-3.898 -2.581,-2.394 cw(c-0.785,-0.598) -3.325,-0.598 -3.325,1.875 -3.325,2.448 cw(c-0.785,2.448) -2.581,4.244 -0.8,5.425 0.623,5.975 cw(c0.623,3.435) 2.419,5.231 ccw(c2.972,5.779) 2.968,5 5.8,5 ccw(c5.8,6.871) 7.123,5.548 8.65,7.075 ccw(c7.202,8.524) 9.25,8.524 9.25,11.8 ccw(c8.948,11.8) 9.162,12.013 6.925,14.25 cw(c7.408,14.733) 6.725,14.733 6.725,16.925 cw(c7.389,16.925) 6.919,17.394 7.325,17.8 7.974,17.8 cw(c7.974,16.349) 9,17.375 16.606,9.769 cw(c15.113,8.275) 17.225,8.275 17.225,7.627 ccw(c19.765,7.627) 17.969,5.831 18.575,5.225 cw(c17.428,4.078) 19.05,4.078 19.05,-0.775 19.05,-3.748 cw(c16.51,-3.748) 18.306,-5.544 17.35,-6.5 ccw(c18.074,-7.224) 17.05,-7.224 17.05,-8.4 cw(c14.877,-8.4) 16.414,-9.936 15.625,-10.725
GND on Top Layer "Top Layer-No Net" (solid, pour order 20): 6.95,6.5 6.95,4.027 ccw(c9.49,4.027) 7.694,2.231 7.95,1.975 ccw(c8.372,2.397) 8.372,1.8 11.4,1.8 15.273,1.8 ccw(c15.273,4.34) 17.069,2.544 18.7,4.175 ccw(c18.398,4.477) 18.825,4.477 18.825,4.925 18.825,5.273 ccw(c16.285,5.273) 18.081,7.069 15.075,10.075 ccw(c14.532,9.532) 14.532,10.3 14.2,10.3 10.327,10.3 ccw(c10.327,7.76) 8.531,9.556 6.9,7.925
GND on Top Layer "Top Layer-No Net" (solid, pour order 18): -2.175,2.025 1.073,2.025 ccw(c1.073,4.565) 2.869,2.769 3.575,3.475 3.781,3.681 ccw(c1.985,5.477) 4.525,5.477 4.525,6.15 ccw(c2.956,6.15) 4.065,7.26 3.8,7.525 2.019,9.306 ccw(c0.223,7.51) 0.223,10.05 -2.9,10.05 ccw(c-2.9,9.205) -3.497,9.803 -4.05,9.25 -4.256,9.044 ccw(c-2.46,7.248) -5,7.248 -5,5.175 -5,4.902 ccw(c-2.46,4.902) -4.256,3.106 -3.575,2.425 ccw(c-2.67,3.33) -2.67,2.05 -2.25,2.05

## Keep-outs
Keep-Out Layer:
  circle w0.01: c-0.025,-0.025 r20

## Silkscreen, mask and mechanical layers (free items; w line width, h text height)
Top Overlay:
  text "D8" at -0.725,15.3 h1.5
  text "D7" at -5.85,15.225 h1.5
  text "D6" at -8.65,15.125 h1.5
  text "D5" at -12.625,11.625 h1.5
  text "D4" at -15.4,7.075 h1.5
  text "A" at 16.625,4.925 h1.5
  text "D3" at -16.25,1.775 h1.5
  text "ООО Микрон Сервис" at -6.475,-4.325 h1.5
  text "R1306-19" at -14.825,-8.525 h1.5
  text "Adapter_board" at -15.225,-9.825 h1.5
  text "D2" at -10.65,-15.725 h1.5
  text "G" at 7.5,-16.2 h1.5
  text "FK" at 1.925,-18.05 h1.5
  text "D1" at -3.6,-18.2 h1.5

## Text inside footprints (layer, text, board x,y; h text height)
P2: Top Overlay "5" at 4.114,-1.708 h1.27; Top Overlay "1" at -4.522,-1.708 h1.27